# EAGLE board Boczek_schm (EAGLE 9.6.2)
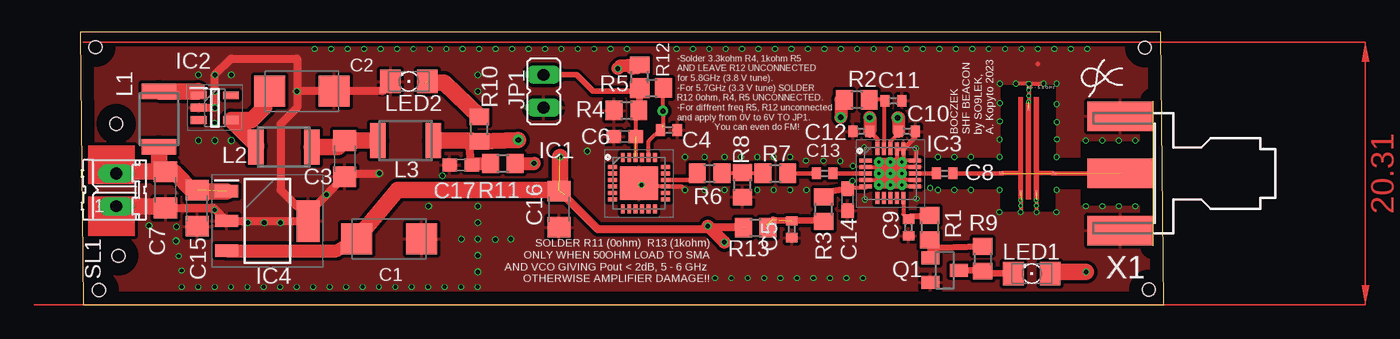
[diagram p0: board, top side]
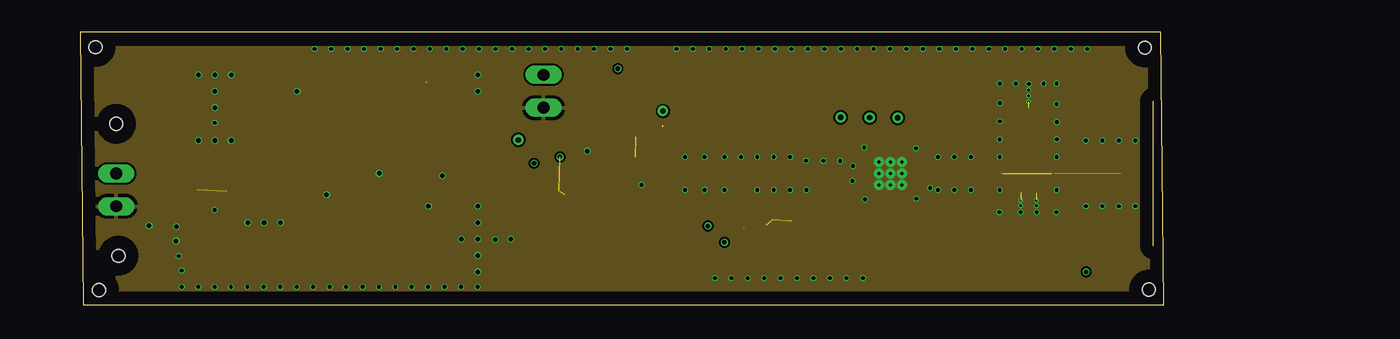
[diagram p1: board, inner layer Route2]
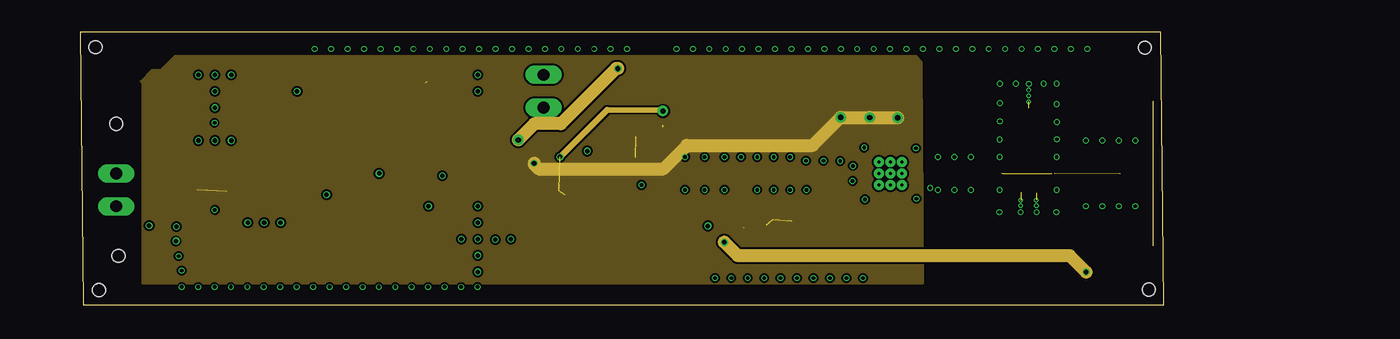
[diagram p2: board, inner layer Route15]
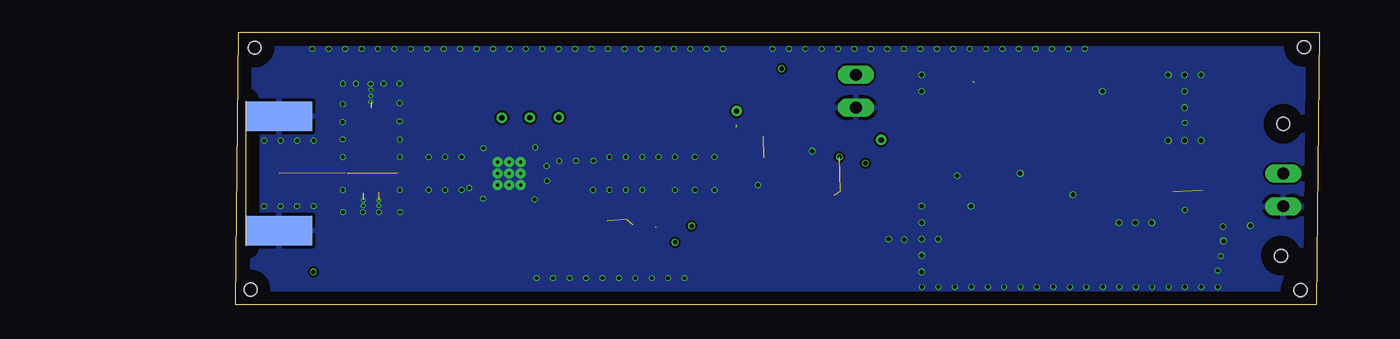
[diagram p3: board, bottom side, seen from below]

Size 83.74 x 21.07 mm. Coordinates in mm from the lower left corner, seen from the top.
Outline: 0.25,0 83.74,0 83.49,21.07 0,21.07 0.25,0
Copper layers (1+2*15+16): Top 0.035mm / dielectric 0.2104mm / Route2 0.035mm / dielectric 1.065mm / Route15 0.035mm / dielectric 0.2104mm / Bottom 0.035mm
Design rules "default *": minimum track width 6mil, minimum drill 0.2mm, track to track 6mil, track to pad 6mil, pad to pad 6mil, via to via 6mil, smd to smd 6mil, copper to edge 40mil, drill to drill 6mil, minimum pad ring 10mil, minimum via ring 3mil, stop-mask expansion 4mil, vias tented up to drill 0mil, thermal gap 10mil
Holes 1 mm at 2.79,14 2.97,3.79 82.27,19.88 82.57,1.17 1.45,1.13 1.18,19.93

## Footprints (pad centres in the part's own frame; a part is rotated, then mirrored left to right if it is on the bottom)
SMC_C = smd 2.4 x 2.4: + -2.5,0; - 2.5,0
C1206 = smd 1.6 x 1.8: 1 -1.4,0; 2 1.4,0
C0402 = smd 0.7 x 0.9: 1 -0.65,0; 2 0.65,0
C0603 = smd 1.1 x 1: 1 -0.85,0; 2 0.85,0
QFN50P400X400X100-25N = smd 0.7 x 0.3: 1 -2.05,1.25; 2 -2.05,0.75; 3 -2.05,0.25; 4 -2.05,-0.25; 5 -2.05,-0.75; 6 -2.05,-1.25; 13 2.05,-1.25; 14 2.05,-0.75; 15 2.05,-0.25; 16 2.05,0.25; 17 2.05,0.75; 18 2.05,1.25 | smd 0.3 x 0.7: 7 -1.25,-2; 8 -0.75,-2; 9 -0.25,-2; 10 0.25,-2; 11 0.75,-2; 12 1.25,-2; 19 1.25,2; 20 0.75,2; 21 0.25,2; 22 -0.25,2; 23 -0.75,2; 24 -1.25,2 | smd 2.95 x 2.56: 25 0,0
SOT95P280X145-5N = smd 1.2 x 0.6: 1 -1.25,0.95; 2 -1.25,0; 3 -1.25,-0.95; 4 1.25,-0.95; 5 1.25,0.95
QFN50P400X400X85-21N = smd 0.95 x 0.3: 1 -1.9,1; 2 -1.9,0.5; 3 -1.9,0; 4 -1.9,-0.5; 5 -1.9,-1; 11 1.9,-1; 12 1.9,-0.5; 13 1.9,0; 14 1.9,0.5; 15 1.9,1 | smd 0.3 x 0.95: 6 -1,-1.9; 7 -0.5,-1.9; 8 0,-1.9; 9 0.5,-1.9; 10 1,-1.9; 16 1,1.9; 17 0.5,1.9; 18 0,1.9; 19 -0.5,1.9; 20 -1,1.9 | drill 0.25 pad 0.254: P$1 -0.889,0.889; P$2 -0.889,-0.889; P$3 0,-0.889; P$4 0,0.889; P$5 0.889,0.889; P$6 0.889,-0.889; P$7 0.889,0; P$8 -0.889,0; P$9 0,0
SOT230P700X180-4N = smd 1.75 x 0.95: 1 -3.15,2.3; 2 -3.15,0; 3 -3.15,-2.3 | smd 1.75 x 3.2: 4 3.15,0
JP1 = drill 0.914 long: 1 0,-1.27; 2 0,1.27
SM-NE45 = smd 1.2 x 2.7: 1 -2.15,0; 2 2.15,0
1206 = smd 1.6 x 1.803: A -1.422,0; C 1.422,0
SOT23 = smd 1 x 1.4: 1 -0.95,-1.1; 2 0.95,-1.1; 3 0,1.1
R0805 = smd 1.3 x 1.5: 1 -0.95,0; 2 0.95,0
02P = drill 0.914 long: 1 -1.27,0; 2 1.27,0
JLC7628_5000_6000_3RDORDER_FILTER = smd 0.305 x 0.152: P$1 -1.319,2.035; P$5 2.783,2.02 | smd 0.152 x 0.305: P$2 0.196,0.516; P$3 0.79,7.076; P$4 1.403,0.498
J502-ND-142-0701-871/876 = smd 5.08 x 2.286: 1 2.565,0; G@1 2.565,4.42; G@2 2.565,-4.42 | smd 5.08 x 2.286 bottom: G@3 2.565,4.42; G@4 2.565,-4.42

## Placement (x,y rotation side)
C1  4.7uF  [SMC_C]  23.88,5.08 0 top
C2  22uF  [SMC_C]  17.14,16.51 0 top
C3  47nF  [C1206]  20.45,11.3 270 top
C4  10pF  [C0402]  45.49,13.51 180 top
C5  2.2uF  [C0402]  54.99,5.84 90 top
C6  1nF  [C0603]  42.09,13 0 top
C7  100nF  [C1206]  6.6,8.89 90 top
C8  10pF  [C0402]  66.8,10.16 0 top
C9  10pF  [C0402]  64.01,5.97 90 top
C10  2.2uF  [C0402]  63.88,13.41 180 top
C11  2.2uF  [C0402]  62.84,15.77 180 top
C12  2.2uF  [C0402]  60.38,13.41 0 top
C13  10pF  [C0402]  57.53,10.16 180 top
C14  1nF  [C0603]  59.31,8.13 90 top
C15  100nF  [C1206]  9.04,7.47 90 top
C16  100nF  [C1206]  37.01,7.39 90 top
C17  1nF  [C0603]  29.41,10.8 0 top
IC1  HMC430LP4ETR  [QFN50P400X400X100-25N]  43.18,9.4 0 top
IC2  TPS613222ADBVR  [SOT95P280X145-5N]  10.41,15.24 0 top
IC3  RFPA5542BTR13  [QFN50P400X400X85-21N]  62.61,10.16 0 top
IC4  MCP1826S-3302E_DB  [SOT230P700X180-4N]  14.48,6.48 0 top
JP1  [JP1]  35.81,16.51 0 top
L1  2.2uH  [SM-NE45]  6.1,14.35 90 top
L2  4.7uH  [SM-NE45]  15.75,12.19 0 top
L3  4.7uH  [SM-NE45]  25.15,12.7 0 top
LED1  [1206]  73.53,2.41 180 top
LED2  [1206]  25.4,17.27 180 top
Q1  BC847  [SOT23]  66.8,2.67 270 top
R1  10k  [R0805]  65.66,5.97 270 top
R2  0  [R0805]  60.02,15.85 180 top
R3  1k  [R0805]  57.45,7.39 90 top
R4  3.3k*  [R0805]  42.21,15.04 0 top
R5  1k  [R0805]  43.23,17.6 90 top
R6  10  [R0805]  48.64,10.16 0 top
R7  10  [R0805]  53.72,10.16 0 top
R8  100  [R0805]  51.18,9.27 90 top
R9  100k  [R0805]  69.72,3.56 270 top
R10  1k  [R0805]  30.86,13.59 90 top
R11  0  [R0805]  32.66,10.92 180 top
R12  0  [R0805]  44.14,16.76 0 top
R13  1k  [R0805]  52.2,5.97 0 top
SL1  [02P]  2.79,8.89 90 top
U$1  INTERDIGITAL_FILTER_3RD_ORDER  [JLC7628_5000_6000_3RDORDER_FILTER]  72.49,8.15 0 top
X1  SMA-142-0701-871/876  [J502-ND-142-0701-871/876]  82.93,10.16 180 top

## Library data of the parts
C1-C17 = rcl; SPICEPREFIX: C
IC1 = SamacSys_Parts; DESCRIPTION: VCO Oscillators VCO SMT w/Buffer amp, 5.0 - 5.5 GHz; HEIGHT: 1mm; MANUFACTURER_NAME: Analog Devices; MANUFACTURER_PART_NUMBER: HMC431LP4ETR; MOUSER_PART_NUMBER: 584-HMC430LP4ETR; MOUSER_PRICE-STOCK: https://www.mouser.co.uk/ProductDetail/Analog-Devices/HMC430LP4ETR?qs=pceeu5JH%2FH8gg6v6ve1tvQ%3D%3D
IC2 = SamacSys_Parts; DESCRIPTION: 6-uA Quiescent Current, 1.8-A Switch Current Boost Converter; HEIGHT: 1.45mm; MANUFACTURER_NAME: Texas Instruments; MANUFACTURER_PART_NUMBER: TPS613222ADBVR; MOUSER_PART_NUMBER: 595-TPS613222ADBVR; MOUSER_PRICE-STOCK: https://www.mouser.co.uk/ProductDetail/Texas-Instruments/TPS613222ADBVR?qs=W0yvOO0ixfE4d69WXsn8NQ%3D%3D
IC3 = SamacSys_Parts; DESCRIPTION: RF Amplifier 5GHZ Discrete PA; HEIGHT: 0.85mm; MANUFACTURER_NAME: Qorvo; MANUFACTURER_PART_NUMBER: RFPA5542BTR13; MOUSER_PART_NUMBER: 772-RFPA5542BTR13; MOUSER_PRICE-STOCK: https://www.mouser.co.uk/ProductDetail/Qorvo/RFPA5542BTR13?qs=u4fy%2FsgLU9OIcUWfOD%252Bf6g%3D%3D
IC4 = SamacSys_Parts; DESCRIPTION: LDO Regulator 1A 3.3V SOT223-3 MCP1826S-3302E/DB, Low Dropout Voltage Regulator, 1A, 3.3 V +/-2%, 2.3 6 Vin, 4-Pin SOT-223; HEIGHT: 1.8mm; MANUFACTURER_NAME: Microchip; MANUFACTURER_PART_NUMBER: MCP1826S-3302E/DB; MOUSER_PART_NUMBER: 579-MCP1826S-3302EDB; MOUSER_PRICE-STOCK: https://www.mouser.co.uk/ProductDetail/Microchip-Technology-Atmel/MCP1826S-3302E-DB?qs=gsqZ4L1luKqjUo%2Fe%2Fgllfg%3D%3D
JP1 = jumper
L1 L3 = inductor-neosid; OC_FARNELL: unknown; OC_NEWARK: unknown
L2 = inductor-neosid; OC_FARNELL: unknown; OC_NEWARK: unknown; SPICEPREFIX: L
LED1 LED2 = led
Q1 = transistor
R1-R3 R10-R13 = rcl; SPICEPREFIX: R
R4-R9 = resistor
SL1 = con-amp-quick; OC_FARNELL: unknown; OC_NEWARK: unknown
U$1 = Alex_RF
X1 = con-coax; MF: JOHNSON COMPONENTS; MPN: 142-0701-871; OC_FARNELL: 1339835; OC_NEWARK: 91B6105

## Nets
+3V3: C1.+ C4.2 C16.2 IC1.20 IC4.3 LED1.A R12.2 R13.1
+5V: C17.2 L3.2 R5.2 R10.1 R11.2
BAT+: C7.2 C15.2 IC4.1 L1.1 SL1.2
BOOSTOUT: C2.+ IC2.4 L2.1
GND [Gnd]: C1.- C2.- C3.2 C4.1 C5.1 C6.1 C7.1 C9.1 C10.1 C11.1 C12.1 C14.1 C15.1 C16.1 C17.1 IC1.15 IC1.25 IC2.2 IC3.2 IC3.4 IC3.11 IC3.12 IC3.14 IC3.15 IC3.16 IC3.17 IC3.P$1 IC3.P$2 IC3.P$3 IC3.P$4 IC3.P$5 IC3.P$6 IC3.P$7 IC3.P$8 IC3.P$9 IC4.2 IC4.4 JP1.1 LED2.C Q1.2 R4.1 R8.1 SL1.1 U$1.P$2 U$1.P$3 U$1.P$4 X1.G@1 X1.G@2 X1.G@3 X1.G@4
N$1: U$1.P$5 X1.1
N$2: IC1.16 R6.1
N$3: R6.2 R7.1 R8.2
N$4: C13.1 IC3.3
N$5: LED2.A R10.2
N$6: C8.2 U$1.P$1
N$7: IC2.1 L1.2
N$8: C13.2 R7.2
N$13: C9.2 IC3.10 R1.1
N$14: LED1.C Q1.3 R9.2
N$15: C3.1 L2.2 L3.1
N$16: Q1.1 R1.2 R9.1
N$17: C8.1 IC3.13
PA_EN: C14.2 IC3.5 R3.2
PA_EN_R: C5.2 R3.1 R13.2
VCC: C10.2 C12.2 IC3.18 IC3.20 R2.2 R11.1
VCC2: C11.2 IC3.19 R2.1
VTUNE: C6.2 IC1.22 JP1.2 R4.2 R5.1 R12.1

## Tracks (layer width: path | path; a pad name or v marks a point on that pad's centre or on a via)
+3V3  (via drill 0.35, 0.4 pad 0.8)  (4 unrouted)
  Top 0.305: IC1.20 43.93,12.65 45.03,13.75 | 45.03,13.75 45.04,13.76 | 45.04,13.91 C4.2 | R12.2 45.03,16.7 v45.03,14.99 45.03,13.75
  Top 0.508: 39.58,6.22 39.62,6.22
  Top 0.61: 51.31,5.97 48.64,5.97 v48.51,6.1 48.26,5.84 40,5.84 39.62,6.22 37.46,8.38 37.46,8.51
  Top 1.016: IC4.3 19.82,4.18 C1.+ | v49.78,4.83 v48.51,6.1
  Top 1.27: v37.08,11.43 37.08,8.89 24.54,8.89 C1.+ | LED1.A 74.93,2.54 v77.72,2.54
  Route15 0.406: v45.03,14.99 44.96,15.06 40.72,15.06
  Route15 0.508: v37.08,11.43 40.72,15.06
  Route15 1.016: v49.78,4.83 50.8,3.81 76.45,3.81 v77.72,2.54
+5V  (via drill 0.35, 0.4 pad 0.8)  (1 unrouted)
  Top 0.61: C17.2 30.06,12.47 30.29,12.7
  Top 1.016: 42.67,18.26 43,18.32 R5.2 41.76,18.46 v41.55,18.26 | C17.2 30.19,10.92 R11.2
  Top 1.27: L3.2 30.29,12.7 R10.1 v33.86,12.74
  Route15 1.016: v33.86,12.75 35.1,14 37.14,14 41.41,18.26 v41.55,18.26
BAT+  (1 unrouted)
  Top 1.27: SL1.2 2.92,10.29 C7.2 | L1.1 6.1,10.8 C7.2 | C7.2 6.68,10.21 7.3,10.21 8.74,8.78 IC4.1
BOOSTOUT
  Top 1.27: L2.1 13.6,12.36 IC2.4 13.27,14.29 14.22,15.24 14.22,16.28 C2.+
GND  (via drill 0.2 pad 0.25, 0.3 pad 0.25, 0.35)  (3 unrouted)
  Top 0.305: IC1.15 44.57,9.15 44.09,9.63 | IC3.2 61.98,10.66 62.48,10.16 | IC3.4 61.53,9.66 61.57,9.7 | IC3.12 63.57,9.66 63.52,9.7 | IC3.11 63.41,9.16 63.4,9.14 | IC3.14 63.36,10.66 63.35,10.64 63.11,10.88 IC3.17 | 63.52,11.16 IC3.15 64.57,11.22 v64.57,12.1 | 63.52,11.16 63.36,11.16 63.35,11.18 | IC3.16 63.61,11.25 63.52,11.16 | v73.28,15.7 73.29,15.72 73.29,17.11 v73.31,17.09 | v74.45,17.09 73.41,17.09 73.36,17.04 v73.31,17.09 | v73.31,17.09 v72.29,17.09 | v72.67,7.16 v72.68,7.17 v72.68,8.09 72.68,9.36 | v73.88,8.1 73.9,8.08 v73.9,7.16
  Top 0.365: IC3.17 IC3.16 64.53,12.98 C10.1 | 73.99,18.62 74.02,18.64 | IC1.15 46.48,9.14 v46.74,8.89
  Top 0.61: 18.03,6.35 18.03,7.49 C3.2 20.7,10.16 v23.11,10.16 | C7.1 10.31,7.49 IC4.2 IC4.4 | v16.76,16.51 C2.- 23.37,16.51 LED2.C | v16.76,16.51 16.76,15.24 15.49,13.97 15.49,8.89 16.76,7.62 | IC2.2 v10.41,15.24 v10.41,16.51 v10.41,17.78 11.68,19.05 16.76,19.05 v16.76,16.51 | R4.1 41.35,15.04
  Top 1.27: C7.1 6.47,7.62 SL1.1
  other vias: 39.19,11.89 29.46,5.08 26.92,7.62 48.26,11.43 49.78,11.43 46.74,11.43 48.26,8.89 49.78,8.89 51.05,11.43 52.32,11.43 53.59,11.43 54.86,11.43 56.07,11.14 57.44,11.14 58.73,11.12 52.32,8.89 53.59,8.89 54.86,8.89 56.13,8.89 75.45,11.43 75.47,12.8 75.46,14.14 75.45,15.52 75.45,17.1 77.72,12.7 78.99,12.7 80.26,12.7 81.53,12.7 75.45,8.89 75.43,7.16 77.72,7.62 78.99,7.62 80.26,7.62 81.53,7.62 43.38,9.27 71.03,7.16 71.05,8.88 68.83,8.89 67.56,8.89 66.29,8.89 10.41,12.7 9.14,12.7 9.14,17.78 11.68,17.78 11.68,12.7 12.95,6.35 14.22,6.35 15.49,6.35 19.04,8.51 27.99,9.98 64.61,8.2 60.58,12.16 60.64,8.15 65.68,9.04 59.69,9.58 59.72,10.74 18.14,19.79 19.41,19.79 20.68,19.79 21.95,19.79 23.22,19.79 24.49,19.79 25.76,19.79 27.03,19.79 28.3,19.79 29.57,19.79 30.84,19.79 32.11,19.79 33.38,19.79 34.65,19.79 35.92,19.79 37.19,19.79 38.46,19.79 39.73,19.79 41,19.79 42.27,19.79 46.08,19.79 47.35,19.79 48.62,19.79 49.89,19.79 51.16,19.79 52.43,19.79 53.7,19.79 54.97,19.79 56.24,19.79 57.51,19.79 58.78,19.79 60.05,19.79 61.32,19.79 62.59,19.79 63.86,19.79 65.13,19.79 66.4,19.79 67.67,19.79 68.94,19.79 70.21,19.79 71.48,19.79 72.75,19.79 74.02,19.79 75.29,19.79 76.56,19.79 77.83,19.79 7.62,3.76 7.85,2.64 7.85,1.37 9.12,1.37 10.39,1.37 11.66,1.37 12.93,1.37 14.2,1.37 15.47,1.37 16.74,1.37 18.01,1.37 19.28,1.37 20.55,1.37 21.82,1.37 24.36,1.37 23.09,1.37 25.63,1.37 26.9,1.37 28.17,1.37 29.44,1.37 30.71,1.37 10.39,14.07 10.41,7.34 71.06,17.09 71.06,15.6 71.06,14.19 71.05,12.79 71.05,11.42 68.83,11.43 67.56,11.43 66.29,11.43 49.05,2.06 50.32,2.06 51.59,2.06 52.86,2.06 54.13,2.06 55.4,2.06 56.67,2.06 57.94,2.06 59.21,2.06 60.48,2.06 30.73,17.78 30.73,16.51 32.08,5.03 33.27,5.08 30.73,7.62 30.73,6.35 30.73,5.08 30.73,3.81 30.73,2.54 7.42,4.93 7.44,6.05 5.33,6.12 73.28,16.14 73.29,16.6 73.89,7.67 72.68,7.67
  pour Top (isolate 0.254): 0.41,20.78 32.56,20.78 32.56,0.58 1.09,0.58 1.09,17.73 0.33,18.49 0.33,20.7
  pour Top (isolate 0.254): 32,20.32 32,0 82.72,0 82.72,7.62 77.27,7.62 77.27,8.89 75.43,8.89 75.43,7.15 71.03,7.15 71.03,8.88 65.02,8.89 65.02,11.42 71.08,11.42 71.08,17.08 75.48,17.08 75.48,11.43 77.27,11.43 77.27,12.7 82.72,12.7 82.72,20.32
  pour Route2: 83.08,0.79 83.08,19.84 0.53,19.84 0.53,0.79
  pour Bottom: 82.8,20.32 82.8,0.46 82.78,0.43 2.16,0.43 0.94,1.65 0.94,19.74 1.52,20.32
N$1  (1 unrouted)
N$2
  Top 0.355: 47.24,10.16 R6.1 47.69,9.82 47.52,9.65 IC1.16
N$3
  Top 0.355: R7.1 52.83,10.12 R8.2 49.53,10.12 R6.2
N$4
  Top 0.355: IC3.3 C13.1
N$5  (1 unrouted)
  Top 1.27: R10.2 28.11,17.19 26.67,17.19
N$6  (2 unrouted)
  Top 0.365: 71.31,10.16 C8.2 | 78.93,10.16 75.07,10.16
N$7
  Top 0.61: IC2.1 6.41,16.19 L1.2
  Top 1.27: 9.12,16.5 L1.2
N$8
  Top 0.355: C13.2 R7.2
N$13
  Top 0.305: IC3.10 63.61,7.02 C9.2
  Top 0.508: C9.2 64.21,6.82 R1.1
N$14
  Top 0.508: Q1.3 69.68,2.67 R9.2 70.02,2.41 LED1.C
N$15
  Top 1.27: L2.2 19.94,12.19 C3.1 | C3.1 | L3.1 C3.1
N$16
  Top 0.508: R1.2 65.7,5.08 65.7,3.81 | 65.7,3.81 Q1.1 | R9.1 66.3,4.41 65.7,3.81
N$17
  Top 0.355: C8.1 IC3.13
PA_EN
  Top 0.305: IC3.5 60.71,9.04 59.57,9.04 C14.2
  Top 0.508: C14.2 57.99,8.78 R3.2
PA_EN_R  (2 unrouted)
  Top 0.508: 53.55,6.6 53.62,6.54 57.35,6.54 R3.1
  Top 1.016: R13.2 53.05,6.16
VCC  (via drill 0.35, 0.4 pad 0.8)
  Top 0.305: C10.2 63.23,13.24 62.61,12.62 IC3.18
  Top 0.365: IC3.20 61.61,12.83 C12.2
  Top 0.406: C12.2
  Top 0.508: C12.2 61.02,13.39 | C10.2 63.32,13.5
  Top 1.016: v61.01,14.48 61.03,14.48 C12.2 | v63.17,14.45 63.23,14.45 C10.2 | R2.2 58.78,15.85 v58.78,14.5 | R11.1 35.05,10.92 v35.08,10.95
  Route15 1.016: v35.08,10.95 35.08,10.86 35.43,10.51 45.07,10.51 46.88,12.31 56.59,12.31 v58.78,14.5 58.8,14.48 v61.01,14.48 61.04,14.45 v63.17,14.45
  pour Route15: 65.02,18.8 65.12,1.62 4.83,1.62 4.83,17.12 4.67,17.27 5.59,18.19 6.27,18.19 7.34,19.25 64.57,19.25
VCC2  (1 unrouted)
  Top 0.305: IC3.19 62.12,15.42 C11.2 62.11,15.85 R2.1 61.31,15.85 61.34,15.53
VTUNE  (1 unrouted)
  Top 0.305: R4.2 42.93,14.8 IC1.22
  Top 0.406: JP1.2 38.35,17.78 39.62,16.51 43.27,16.51 R12.1
  Top 0.508: R4.2 43.22,15.19 R5.1 43.23,16.72 R12.1
(copper drawn outside any net)
  shapes: Top area x4

## Text on the board
tNames: -Solder 3.3kohm R4, 1kohm R5 / AND LEAVE R12 UNCONNECTED / for 5.8GHz (3.8 V tune). / -For 5.7GHz (3.3 V tune) SOLDER / R12 0ohm, R4, R5 UNCONNECTED. / -For diffrent freq R5, R12 unconnected / and apply from 0V to 6V TO JP1. / You can even do FM! | BOCZEK / SHF BEACON / by SO9LEK, / A. Kopyto 2023 | SOLDER R11 (0ohm) R13 (1kohm) / ONLY WHEN 50OHM LOAD TO SMA / AND VCO GIVING Pout < 2dB, 5 - 6 GHz / OTHERWISE AMPLIFIER DAMAGE!!